# EAGLE board Nusbio 2-MCU-EX (EAGLE 7.6.0)

Size 32 x 43 mm. Coordinates in mm from the lower left corner, seen from the top.
Outline: 0,0 32,0 32,43 0,43 0,0
Copper layers (1*16): Top 0.035mm / dielectric 1.5mm / Bottom 0.035mm
Design rules "default": minimum track width 10mil, minimum drill 24mil, track to track 8mil, track to pad 8mil, pad to pad 8mil, via to via 8mil, smd to smd 8mil, copper to edge 40mil, drill to drill 8mil, minimum pad ring 10mil, minimum via ring 8mil, stop-mask expansion 4mil, vias tented up to drill 0mil, thermal gap 10mil

## Footprints (pad centres in the part's own frame; a part is rotated, then mirrored left to right if it is on the bottom)
1X10-BIG = drill 1.016 pad 1.778 octagon: 1 -11.43,0; 2 -8.89,0; 3 -6.35,0; 4 -3.81,0; 5 -1.27,0; 6 1.27,0; 7 3.81,0; 8 6.35,0; 9 8.89,0; 10 11.43,0
1X04 = drill 1.016 long: 1 -3.81,0; 2 -1.27,0; 3 1.27,0; 4 3.81,0
1X12 = drill 1.016 long: 1 -13.97,0; 2 -11.43,0; 3 -8.89,0; 4 -6.35,0; 5 -3.81,0; 6 -1.27,0; 7 1.27,0; 8 3.81,0; 9 6.35,0; 10 8.89,0; 11 11.43,0; 12 13.97,0
1X02 = drill 1.016 long: 1 -1.27,0; 2 1.27,0

## Placement (x,y rotation side)
ANALOG_I2C  PINHD-1X10  [1X10-BIG]  1.6,16 270 top
ATMEGA_A4_A7  [1X04]  16.5,6 0 top
ATMEGA_LEFT  [1X12]  9,20 90 top
ATMEGA_RIGHT  [1X12]  24,20 90 top
GPIOS  PINHD-1X10  [1X10-BIG]  16,41.5 180 top
NUSBIO2_CS  [1X02]  29.2,33 270 top
NUSBIO2_INPUT  PINHD-1X10  [1X10-BIG]  16,1.5 180 top
SPI  PINHD-1X10  [1X10-BIG]  30.5,16 270 top

## Library data of the parts
ANALOG_I2C ATMEGA_LEFT ATMEGA_RIGHT GPIOS NUSBIO2_INPUT SPI = adafruit
ATMEGA_A4_A7 NUSBIO2_CS = pinhead

## Nets
ANAL_0: ANALOG_I2C.5 ATMEGA_LEFT.5
ANAL_1: ANALOG_I2C.6 ATMEGA_LEFT.6
ANAL_2: ANALOG_I2C.7 ATMEGA_LEFT.7
ANAL_3: ANALOG_I2C.8 ATMEGA_LEFT.8
ANAL_6: ATMEGA_A4_A7.3
ANAL_7: ATMEGA_A4_A7.4
AT_RST: ATMEGA_RIGHT.10
AT_RXD: ATMEGA_RIGHT.11
AT_TXD: ATMEGA_RIGHT.12
FT4222_CS0: NUSBIO2_CS.1 NUSBIO2_INPUT.4
FT4222_CS3: NUSBIO2_CS.2 NUSBIO2_INPUT.5
FT4222_GPIO3: NUSBIO2_INPUT.6
GND: ANALOG_I2C.10 ATMEGA_RIGHT.9 GPIOS.10 NUSBIO2_INPUT.10 SPI.10
GPIO_2: ATMEGA_RIGHT.8 GPIOS.1
GPIO_3: ATMEGA_RIGHT.7 GPIOS.2
GPIO_4: ATMEGA_RIGHT.6 GPIOS.3
GPIO_5: ATMEGA_RIGHT.5 GPIOS.4
GPIO_6: ATMEGA_RIGHT.4 GPIOS.5
GPIO_7: ATMEGA_RIGHT.3 GPIOS.6
GPIO_8: ATMEGA_RIGHT.2 GPIOS.7
GPIO_9: ATMEGA_RIGHT.1 GPIOS.8
GPIO_10: ATMEGA_LEFT.1 SPI.4
GPIO_11: ATMEGA_LEFT.2 SPI.8
GPIO_12: ATMEGA_LEFT.3
GPIO_13: ATMEGA_LEFT.4
I2C_SCL: ANALOG_I2C.1 ANALOG_I2C.3 ATMEGA_A4_A7.2 NUSBIO2_INPUT.7
I2C_SDA: ANALOG_I2C.2 ANALOG_I2C.4 ATMEGA_A4_A7.1 NUSBIO2_INPUT.8
SPI_CLK: NUSBIO2_INPUT.1 SPI.1 SPI.5
SPI_MISO: NUSBIO2_INPUT.3 SPI.3 SPI.7
SPI_MOSI: NUSBIO2_INPUT.2 SPI.2 SPI.6
VCC_3V: ANALOG_I2C.9 ATMEGA_LEFT.9 GPIOS.9 NUSBIO2_INPUT.9 SPI.9

## Tracks (layer width: path | path; a pad name or v marks a point on that pad's centre or on a via)
ANAL_0  (1 unrouted)
ANAL_1  (1 unrouted)
ANAL_2  (1 unrouted)
ANAL_3  (1 unrouted)
FT4222_CS0  (1 unrouted)
FT4222_CS3  (1 unrouted)
GND  (4 unrouted)
GPIO_2  (1 unrouted)
GPIO_3  (1 unrouted)
GPIO_4  (1 unrouted)
GPIO_5  (1 unrouted)
GPIO_6  (1 unrouted)
GPIO_7  (1 unrouted)
GPIO_8  (1 unrouted)
GPIO_9  (1 unrouted)
GPIO_10  (1 unrouted)
GPIO_11  (1 unrouted)
I2C_SCL  (3 unrouted)
I2C_SDA  (3 unrouted)
SPI_CLK  (2 unrouted)
SPI_MISO  (2 unrouted)
SPI_MOSI  (2 unrouted)
VCC_3V  (4 unrouted)

## Text on the board
tNames: GND | 3V | G9~ | G8 | G7 | G6~ | G5~ | G4 | G3~ | G2 | SPI | SCL | CLCK | SDA | MOSI | SCL | MISO | SDA | G10 | A0 | CLCK | A1 | MOSI | A2 | MISO | A3 | G11 | 3V | 3V | GND | GND
bNames: MadeInTheUSB.net | NUSBIO2 / FULL | PCBv1 2017.03 /FT